# EAGLE board 5led_pwm (EAGLE 5.10)
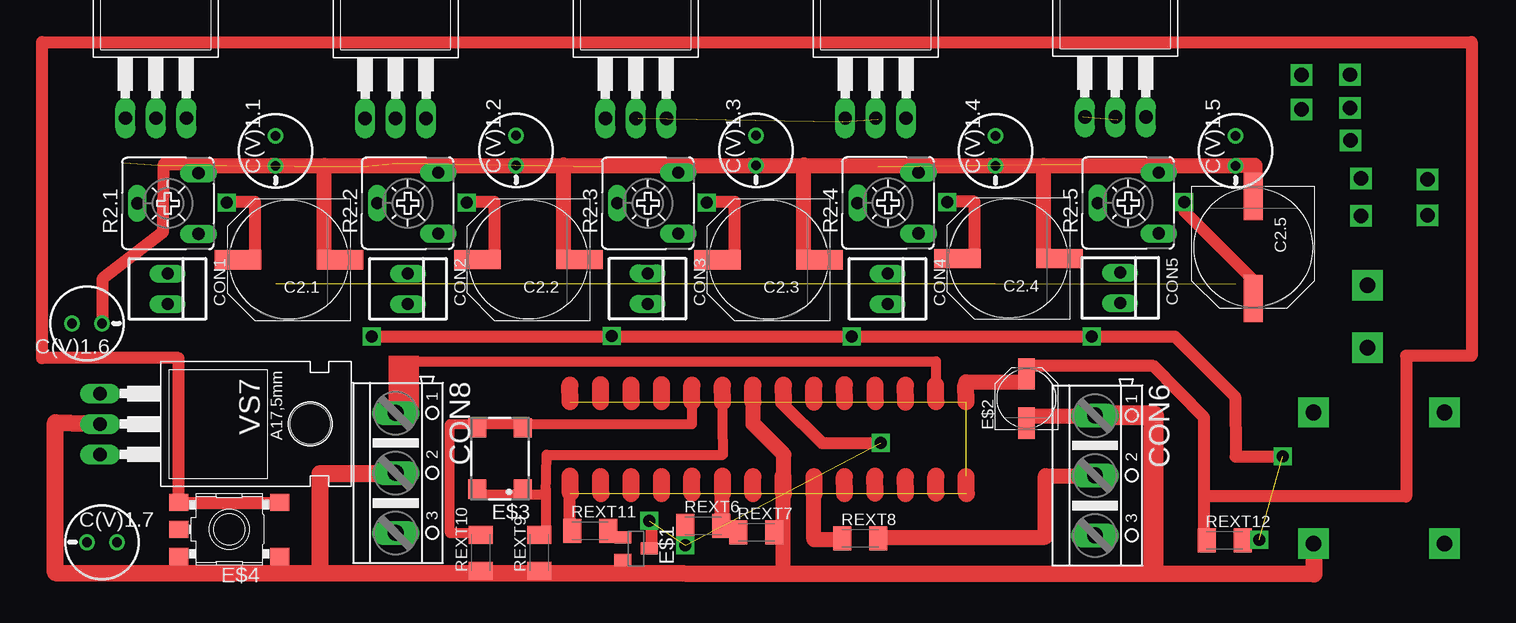
[diagram p0: board, top side]
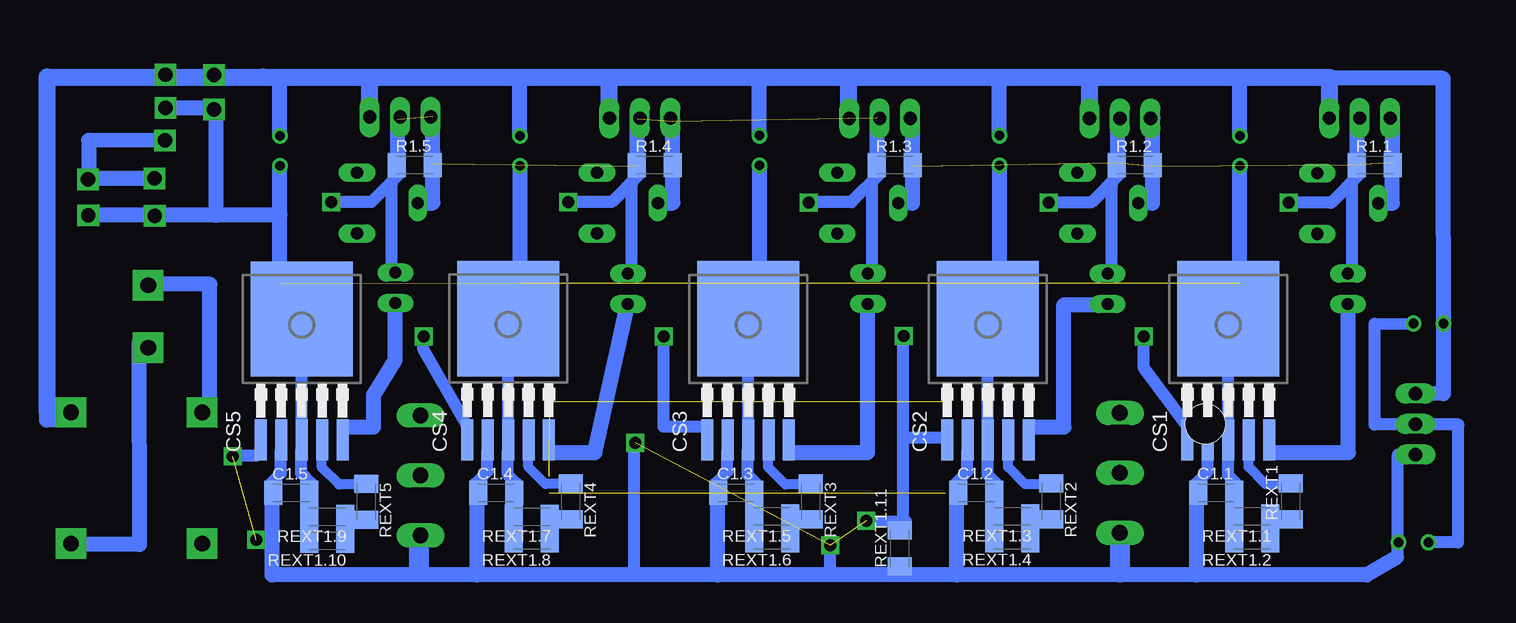
[diagram p1: board, bottom side, seen from below]

No outline drawn. Coordinates in mm, seen from the top.
Copper layers (1*16): Top 0.035mm / dielectric 1.5mm / Bottom 0.035mm
Design rules "default": minimum track width 10mil, minimum drill 24mil, track to track 8mil, track to pad 8mil, pad to pad 8mil, via to via 8mil, smd to smd 8mil, copper to edge 40mil, drill to drill 8mil, minimum pad ring 10mil, minimum via ring 8mil, stop-mask expansion 4mil, vias tented up to drill 0mil, thermal gap 10mil

## Footprints (pad centres in the part's own frame; a part is rotated, then mirrored left to right if it is on the bottom)
C1206K = smd 1.5 x 2: 1 -1.5,0; 2 1.5,0
PANASONIC_G = smd 3.9 x 1.6: + 4.25,0; - -4.25,0
SANYO-OSCON_D = drill 0.8 pad 1.27 round: + 1.25,0; - -1.25,0
22-23-2021 = drill 1 long: 1 -1.27,0; 2 1.27,0
AK500/3 = drill 1.321 long: 1 -5.004,0; 2 0,0; 3 5.004,0
TO263-51 = smd 1 x 3.4: 1 -3.4,-6.6; 2 -1.7,-6.6; 3 0,-6.6; 4 1.7,-6.6; 5 3.4,-6.6 | smd 8.5 x 9.6: 6 0,3.5
SOT23-BCE = smd 1 x 1.4: B -0.95,-1.1; C 0.95,-1.1; E 0,1.1
PANASONIC_C = smd 2.6 x 1.4: + 2.05,0; - -2.05,0
SM77H = smd 1.6 x 1.5: 1 -2.55,-1.9; 2 2.55,-1.9; 3 2.55,1.9; 4 -2.55,1.9
SKHMPXE010 = smd 1.6 x 1.4: 1 -4.2,2.25; 2 4.2,2.25; 3 -4.2,-2.25; 4 4.2,-2.25; 5 4.2,0
CA6V = drill 1.016 long: A -2.54,-2.54; E 2.54,-2.54; S 0,2.54
TO220 = drill 1.118 long: 1 -2.54,-6.35; 2 0,-6.35; 3 2.54,-6.35 | hole 3.302: 0,11.176

## Placement (x,y rotation side)
C1.1  100nF  [C1206K]  22,7.5 0 bottom
C1.2  100nF  [C1206K]  41.99,7.5 0 bottom
C1.3  100nF  [C1206K]  62,7.5 0 bottom
C1.4  100nF  [C1206K]  82,7.49 0 bottom
C1.5  100nF  [C1206K]  99.07,7.48 0 bottom
C2.1  100uF  [PANASONIC_G]  21.12,26.92 180 top
C2.2  100uF  [PANASONIC_G]  41.08,26.93 180 top
C2.3  100uF  [PANASONIC_G]  61.09,26.92 180 top
C2.4  100uF  [PANASONIC_G]  81.08,27.02 180 top
C2.5  100uF  [PANASONIC_G]  101.47,27.95 270 top
C(V)1.1  0.1uF  [SANYO-OSCON_D]  20.01,36.01 90 top
C(V)1.2  0.1uF  [SANYO-OSCON_D]  40.05,36.03 90 top
C(V)1.3  0.1uF  [SANYO-OSCON_D]  60.04,36.03 90 top
C(V)1.4  0.1uF  [SANYO-OSCON_D]  80,36.01 90 top
C(V)1.5  0.1uF  [SANYO-OSCON_D]  100.01,36.01 90 top
C(V)1.6  0.1uF  [SANYO-OSCON_D]  4.3,21.61 180 top
C(V)1.7  0.1uF  [SANYO-OSCON_D]  5.54,3.36 0 top
CON1  PLED1  [22-23-2021]  11.01,24.5 270 top
CON2  PLED2  [22-23-2021]  31.04,24.5 270 top
CON3  PLED3  [22-23-2021]  51.01,24.51 270 top
CON4  PLED4  [22-23-2021]  71.01,24.5 270 top
CON5  PLED5  [22-23-2021]  90.39,24.57 270 top
CON6  Potentiometer  [AK500/3]  88.3,8.93 270 top
CON8  Sensor  [AK500/3]  30.02,9.14 270 top
CS1  MBI_1801  [TO263-51]  20.99,18.5 0 bottom
CS2  MBI_1801  [TO263-51]  41.01,18.5 0 bottom
CS3  MBI_1801  [TO263-51]  61,18.5 0 bottom
CS4  MBI_1801  [TO263-51]  81,18.51 0 bottom
CS5  MBI_1801  [TO263-51]  98.2,18.49 0 bottom
E$1  [SOT23-BCE]  50.04,2.84 270 top
E$2  [PANASONIC_C]  82.59,15.34 90 top
E$3  [SM77H]  38.7,10.35 90 top
E$4  [SKHMPXE010]  16.15,4.45 180 top
R1.1  240 Ohm  [C1206K]  8.77,34.8 0 bottom
R1.2  240 Ohm  [C1206K]  28.76,34.8 0 bottom
R1.3  240 Ohm  [C1206K]  48.77,34.8 0 bottom
R1.4  240 Ohm  [C1206K]  68.79,34.81 0 bottom
R1.5  240 Ohm  [C1206K]  88.78,34.82 0 bottom
R2.1  5k Ohm  [CA6V]  11.04,31.62 90 top
R2.2  5k Ohm  [CA6V]  31.02,31.64 90 top
R2.3  5k Ohm  [CA6V]  51.03,31.64 90 top
R2.4  5k Ohm  [CA6V]  71.05,31.66 90 top
R2.5  5k Ohm  [CA6V]  91.06,31.66 90 top
REXT1  [C1206K]  15.77,6.77 90 bottom
REXT1.1  [C1206K]  19,5.51 180 bottom
REXT1.2  [C1206K]  19,3.52 180 bottom
REXT1.3  [C1206K]  38.99,5.53 180 bottom
REXT1.4  [C1206K]  38.99,3.54 180 bottom
REXT1.5  [C1206K]  59,5.51 180 bottom
REXT1.6  [C1206K]  59,3.52 180 bottom
REXT1.7  [C1206K]  79.01,5.5 180 bottom
REXT1.8  [C1206K]  79.01,3.51 180 bottom
REXT1.9  [C1206K]  96.07,5.49 180 bottom
REXT1.10  [C1206K]  96.07,3.5 180 bottom
REXT1.11  [C1206K]  48.35,2.84 90 bottom
REXT2  [C1206K]  35.74,6.78 270 bottom
REXT3  [C1206K]  55.76,6.76 270 bottom
REXT4  [C1206K]  75.78,6.76 270 bottom
REXT5  [C1206K]  92.84,6.75 270 bottom
REXT6  [C1206K]  55.65,4.74 0 top
REXT7  [C1206K]  60.08,4.17 0 top
REXT8  [C1206K]  68.73,3.67 0 top
REXT9  [C1206K]  41.97,2.49 90 top
REXT10  [C1206K]  37.09,2.49 90 top
REXT11  [C1206K]  46.22,4.32 0 top
REXT12  [C1206K]  99.09,3.51 0 top
VS1  LM350  [TO220]  10.03,45.08 0 top
VS2  LM350  [TO220]  30.01,45.06 0 top
VS3  LM350  [TO220]  50.03,45.07 0 top
VS4  LM350  [TO220]  70.02,45.08 0 top
VS5  LM350  [TO220]  89.99,45.17 0 top
VS7  7805  [TO220]  11.73,13.22 270 top

## Library data of the parts
C1.1-C1.5 R1.1-R1.5 REXT1 REXT1.1-REXT1.11 REXT2-REXT12 = resistor
C2.1-C2.5 C(V)1.1-C(V)1.7 E$2 = rcl
CON1-CON5 = con-molex
CON6 CON8 = con-ptr500
CS1-CS5 E$1 = ref-packages
E$3 = crystal
E$4 = switch
R2.1-R2.5 = pot
VS1-VS5 VS7 = ref-packages-longpad

## Nets
S$11: R2.3.S
S$12: R2.4.S R2.5.S

## Tracks (layer width: path | path; a pad name or v marks a point on that pad's centre or on a via)
S$1
  Bottom 1.422: 12.55,38.74 12.55,42.11 32.46,42.11
S$2
  Bottom 1.422: 32.54,38.7 32.54,42.11 52.49,42.11
S$3
  Bottom 1.422: 52.61,38.74 52.61,42.11 72.48,42.11
S$4
  Bottom 1.422: 72.56,38.74 72.56,42.11 93.26,42.11
S$5
  Bottom 1.27: 20.02,37.28 20.02,42.21
S$6
  Bottom 1.27: 40.06,37.31 40.06,42.21
S$7
  Bottom 1.27: 60.06,37.28 60.06,42.21
S$8
  Bottom 1.27: 80.01,37.26 80.01,42.21
S$9
  Bottom 1.422: 92.55,38.82 92.55,42.11 101.97,42.11
S$10
  Bottom 1.27: 100.02,37.27 100.02,42.2 100,42.2
S$11  (4 unrouted)
  Bottom 1.27: 47.3,38.75 47.3,36.35 47.3,34.68 47.3,31.64 R2.3.S | 27.27,34.7 27.27,38.77 | 30.21,35 30.21,39.07 | 10.23,34.82 10.23,38.89 | 7.3,35.02 7.3,39.09
S$12  (4 unrouted)
  Bottom 1.27: 50.23,34.79 50.23,38.73 | 67.27,38.46 67.27,31.66 R2.4.S | 70.23,34.7 70.23,38.64 | 90.21,34.66 90.21,38.6 | 87.26,38.85 87.26,35.91 87.26,34.91 87.26,31.66 R2.5.S
S$13
  Top 1.27: 13.59,34.13 13.59,34.77 20.03,34.77
S$14
  Top 1.27: 33.57,34.19 33.57,34.79 39.72,34.79 40.07,34.79 53.55,34.79 53.55,34.18
S$15
  Top 1.27: 53.59,34.17 53.59,34.79 59.56,34.79 60.06,34.79 73.56,34.79 73.56,34.21
S$16
  Top 1.27: 73.6,34.23 73.6,34.77 80.05,34.77
S$17
  Top 1.27: 93.61,34.21 93.61,34.77 100.04,34.77
S$18
  Top 1.27: 33.57,34.17 33.57,34.78 19.71,34.78
S$19
  Top 1.27: 93.62,34.19 93.62,34.78 79.54,34.78
S$20
  Bottom 1.27: 8.49,31.62 7.31,31.62 7.31,35.97
S$21
  Bottom 1.27: 28.5,31.64 27.28,31.64 27.28,36.01
S$22
  Top 1.27: 100.04,34.78 101.64,34.78 101.64,31.33
S$23
  Top 1.27: 85.15,27 84.01,27 84.01,34.8
S$24
  Top 1.27: 65.17,26.88 64.03,26.88 64.03,34.83
S$25
  Top 1.27: 45.22,26.91 44.02,26.91 44.02,34.83
S$26
  Top 1.27: 25.15,26.91 24.07,26.91 24.07,34.8
S$27  (via drill 1)
  other vias: 75.98,31.73
S$28  (via drill 1)
  other vias: 95.72,31.73
S$29  (via drill 1)
  other vias: 55.94,31.7
S$30  (via drill 1)
  Bottom 1.016: v35.96,31.7 32.41,31.7 30.02,34.09
S$31  (via drill 1)
  other vias: 15.95,31.7
S$32
  Bottom 1.016: 15.94,31.69 12.42,31.69 10.01,34.1
S$33
  Bottom 1.016: 55.96,31.72 52.39,31.72 50.03,34.08
S$34
  Bottom 1.016: 75.99,31.74 72.38,31.74 70.07,34.05
S$35
  Bottom 1.016: 95.76,31.74 92.39,31.74 90.04,34.09
S$36
  Top 1.016: 16,31.74 18.31,31.74 18.31,27.08
S$37
  Top 1.016: 36,31.74 38.27,31.74 38.27,26.85
S$38
  Top 1.016: 55.94,31.74 58.29,31.74 58.29,26.95
S$39
  Top 1.016: 75.97,31.76 78.27,31.76 78.27,27.18
S$40
  Top 1.016: 101.53,25.19 95.77,30.95 95.77,31.72
S$41
  Bottom 1.016: 31.01,25.82 30.69,25.82 30.69,33.14
S$42
  Bottom 1.016: 11.07,25.74 10.67,25.74 10.67,33.24
S$43
  Bottom 1.016: 51.23,25.76 50.66,25.76 50.66,33.22
S$44
  Bottom 1.016: 71.27,25.8 70.68,25.8 70.68,33.2
S$45
  Bottom 1.016: 91.37,25.8 90.68,25.8 90.68,33.24
S$46
  Bottom 1.27: 10.98,23.23 10.98,10.83 17.28,10.83
S$47
  Bottom 1.27: 37.34,12.96 34.68,12.96 34.68,23.18 30.82,23.18
S$48
  Bottom 1.27: 51.04,23.27 51.04,10.83 57.27,10.83
S$49
  Bottom 1.27: 71.01,23.24 73.76,10.83 77.21,10.83
S$50
  Bottom 1.27: 90.41,23.3 90.41,18.57 92.21,15.66 92.21,12.95 94.58,12.95
S$51
  Bottom 1.016: 20.98,11.42 20.98,18.5
S$52
  Bottom 1.016: 41.01,11.98 41.01,18.5
S$53
  Bottom 1.016: 61,12.15 61,18.5
S$54
  Bottom 1.016: 80.98,18.52 80.98,11.64 81,11.64
S$55
  Bottom 1.016: 98.19,11.81 98.19,18.5
S$56  (4 unrouted)
  Bottom 1.27: 20.01,24.95 20.01,34.8 | 40.04,24.92 40.04,34.77 | 60.02,24.92 60.02,34.77 | 80,24.92 80,34.77 | 100.01,24.89 100.01,34.74
S$57
  Bottom 1.016: 20.99,11 20.99,8.96 20.26,8.23
S$58
  Bottom 1.016: 22.71,10.98 22.71,9.24 23.75,8.2
S$59
  Bottom 1.016: 41.03,10.98 41.03,8.99 40.25,8.21
S$60
  Bottom 1.016: 42.72,11 42.72,9.24 43.73,8.23
S$61
  Bottom 1.016: 61.03,10.98 61.03,8.99 60.26,8.22
S$62
  Bottom 1.016: 62.73,11 62.73,9.26 63.75,8.24
S$63
  Bottom 1.016: 81.01,11.01 81.01,8.99 80.27,8.25
S$64
  Bottom 1.016: 82.73,11 82.73,9.25 83.74,8.24
S$65
  Bottom 1.016: 98.25,10.98 98.25,9.14 97.35,8.24
S$66
  Bottom 1.016: 99.93,11 99.93,9.1 100.81,8.22
S$67
  Bottom 0.813: 19.3,10.8 19.3,9.63 17.88,8.21 16.3,8.21
S$68
  Bottom 0.813: 39.33,10.8 39.33,9.63 37.91,8.21 36.33,8.21
S$69
  Bottom 0.813: 59.32,10.76 59.32,9.59 57.9,8.17 56.32,8.17
S$70
  Bottom 0.813: 79.31,10.81 79.31,9.64 77.89,8.22 76.31,8.22
S$71
  Bottom 0.813: 96.51,10.76 96.51,9.59 95.09,8.17 93.51,8.17
S$72
  Bottom 1.27: 14.92,42.08 3.08,42.06 3.05,15.81
S$73
  Bottom 1.016: 5.52,21.59 8.8,21.57 8.79,13.17 5.3,13.17
S$74
  Bottom 1.016: 5.48,13.18 1.82,13.18 1.84,3.35 4.36,3.35
S$75
  Bottom 1.016: 5.31,10.69 6.86,10.69 6.86,2.07
S$76
  Top 1.016: 5.61,21.61 5.61,25.39 10.63,29.26 10.69,34.9 14.08,34.9
S$77
  Bottom 1.27: 23.62,0.63 23.62,7.6 | 23.62,0.63 9.43,0.63 6.96,2.12 | 43.61,0.63 43.61,7.6 | 23.62,0.63 43.61,0.63 | 63.55,0.63 63.55,7.65 | 43.61,0.63 63.55,0.63 | 83.58,0.63 83.58,7.65 | 63.55,0.63 83.58,0.63 | 100.67,7.46 100.67,0.63 83.58,0.63
S$78
  Bottom 1.27: 3.05,15.75 5.36,15.78
S$79  (via drill 1.3 pad 2.54)
  other vias: 106.49,14.19
S$80  (via drill 1.3 pad 2.54)
  other vias: 117.41,14.19
S$81  (via drill 1.3 pad 2.54)
  other vias: 117.41,3.26
S$82  (via drill 1.3 pad 2.54)
  other vias: 106.49,3.26
S$83
  Bottom 1.422: 101.44,42.15 119.42,42.15 119.42,14.28
S$84  (via drill 1.3 pad 2.54)
  other vias: 110.99,24.81
S$85  (via drill 1.3 pad 2.54)
  other vias: 110.99,19.58
S$86
  Top 1.422: 106.55,3.38 106.55,0.72 1.66,0.82 1.66,13.34 5.69,13.24
S$87
  Bottom 1.27: 110.97,24.89 105.85,24.89 105.85,13.9
S$88
  Bottom 1.27: 117.39,3.18 111.71,3.18 111.73,20.03
S$89  (via drill 1.2 pad 0.81)
  other vias: 116,33.62
S$90  (via drill 1.2 pad 0.81)
  other vias: 109.54,39.59
S$91  (via drill 1.2 pad 0.81)
  other vias: 109.59,36.88
S$92  (via drill 1.2 pad 0.81)
  other vias: 109.56,42.36
S$93  (via drill 1.2 pad 0.81)
  other vias: 115.99,30.64
S$94
  Bottom 1.27: 115.95,33.44 115.95,36.88 109.54,36.87
S$95
  Bottom 1.27: 100,30.65 115.98,30.66
S$96  (via drill 1.2 pad 0.81)
  other vias: 105.51,42.35
S$97  (via drill 1.2 pad 0.81)
  other vias: 105.51,39.47
S$98  (via drill 1.2 pad 0.81)
  other vias: 110.47,33.71
S$99  (via drill 1.2 pad 0.81)
  other vias: 110.45,30.58
S$100
  Bottom 1.27: 117.37,13.55 119.45,13.55 119.43,14.25
S$101
  Bottom 1.27: 109.57,39.58 105.34,39.58 105.34,30.64
S$102
  Bottom 1.27: 110.49,33.67 115.67,33.67
S$105
  Top 1.422: 30.13,9.1 23.72,9.1 23.72,0.79
S$106
  Bottom 1.676: 29.47,4.13 29.99,4.13 29.99,0.83
S$107
  Bottom 1.676: 87.31,3.97 88.39,3.97 88.39,0.92
S$108
  Top 1.676: 88.23,13.94 93.2,13.94 93.2,0.95
S$109
  Top 1.27: 57.24,4.38 57.24,8.07
S$110
  Top 1.27: 62.35,8.16 62.32,8.16 62.32,0.67
S$111
  Top 1.27: 64.86,8.11 64.86,3.59 67.13,3.59
S$112
  Top 1.27: 70.19,3.79 84.15,3.79 84.15,8.9 88.29,8.9
S$113
  Top 1.27: 82.55,13.91 88.32,13.91
S$114
  Top 1.27: 77.55,15.8 77.55,16.74 82.66,16.74
S$115
  Top 1.27: 59.81,15.75 59.81,13.23 62.36,10.68 62.36,7.95
S$116
  Top 0.813: 36.86,7.36 42.54,7.36 42.59,10.66 57.3,10.66 57.25,15.92
S$117
  Top 0.813: 54.73,15.78 54.73,13.22 34.54,13.22 34.54,4.14 37.09,4.14 37.09,4.11
S$118
  Top 0.813: 41.45,3.91 42.56,3.91 42.56,7.74
S$119
  Top 0.813: 29.97,13.96 29.97,18.46 75.03,18.46 75.03,15.68
S$120  (via drill 1)  (2 unrouted)
  other vias: 51.14,5.13 70.42,11.64 54.15,3.1
S$121  (via drill 1)
  other vias: 48.03,20.58
S$122  (via drill 1)
  other vias: 68.04,20.54
S$123  (via drill 1)
  other vias: 88.01,20.54
S$124  (via drill 1)  (1 unrouted)
  other vias: 103.94,10.53 102,3.55
S$125  (via drill 1)
  Bottom 1.016: 24.39,13.08 28.04,17.96 v28.04,20.53
S$126
  Bottom 1.016: 44.4,12.06 48.09,12.06 48.09,20.61
S$127
  Bottom 1.016: 64.46,12.99 68.04,12.99 68.04,20.58
S$128
  Bottom 1.016: 84.45,13.09 88.06,19.46 88.06,20.58
S$129
  Bottom 1.016: 103.88,10.62 101.88,10.62
S$130
  Top 1.016: 44.51,8.19 44.51,4.31 44.46,4.31
S$131
  Top 1.016: 51.25,2.86 51.35,2.89 51.35,5.18
S$132
  Bottom 1.016: 51.31,5.07 47.84,5.07 47.84,4.4
S$133
  Bottom 1.016: 48.08,13.67 48.08,4.85 48.07,4.85
S$134
  Top 1.016: 27.94,20.52 94.95,20.52 99.98,15.49 100.02,10.51 104.02,10.51
S$135
  Top 1.016: 70.46,11.64 65.55,11.64 62.32,14.87
S$136
  Bottom 1.016: 70.47,11.67 70.47,0.74 70.44,0.74
S$137
  Bottom 1.016: 54.16,3.11 54.16,0.61 54.12,0.61
S$138
  Top 1.016: 82.6,18.05 93.21,18.05 97.39,13.76 97.39,3.6
S$139
  Top 1.016: 11.73,6.65 20.45,6.65
S$140
  Top 1.016: 11.92,6.66 11.92,18.72 0.56,18.72 0.56,45.07 119.67,45.07 119.67,18.91 114.22,18.91 114.22,7.18 97.57,7.17
S$141  (27 unrouted)
  Top 1.422: 44.57,7.45 44.56,8.86 | 47.11,7.42 47.1,8.83 | 49.64,7.43 49.63,8.84 | 52.18,7.43 52.17,8.84 | 54.71,7.45 54.7,8.86 | 57.27,7.45 57.26,8.86 | 59.79,7.43 59.78,8.84 | 62.32,7.43 62.31,8.84 | 64.89,7.43 64.88,8.84 | 67.42,7.43 67.41,8.84 | 69.97,7.45 69.96,8.86 | 72.51,7.44 72.5,8.85 | 75.04,7.46 75.03,8.87 | 77.57,7.44 77.56,8.85 | 77.55,15.07 77.54,16.48 | 75.03,15.07 75.02,16.48 | 72.51,15.06 72.5,16.47 | 69.99,15.07 69.98,16.48 | 67.42,15.08 67.41,16.49 | 64.87,15.06 64.86,16.47 | 62.34,15.07 62.33,16.48 | 59.79,15.06 59.78,16.47 | 57.26,15.06 57.25,16.47 | 54.71,15.07 54.7,16.48 | 52.18,15.08 52.17,16.49 | 49.65,15.07 49.64,16.48 | 47.1,15.08 47.09,16.49 | 44.55,15.07 44.54,16.48
(copper drawn outside any net)
  shapes: Top area x1